# Altium PCB AccShelf2.PcbDoc
Units mm, origin at the board's own origin, x right, y up, seen from the top; angles counter-clockwise.
Board outline 195 x 72 mm, 2 copper layers (Top Layer, Bottom Layer); 32 components, 49 nets, 164 pads, 94 vias.
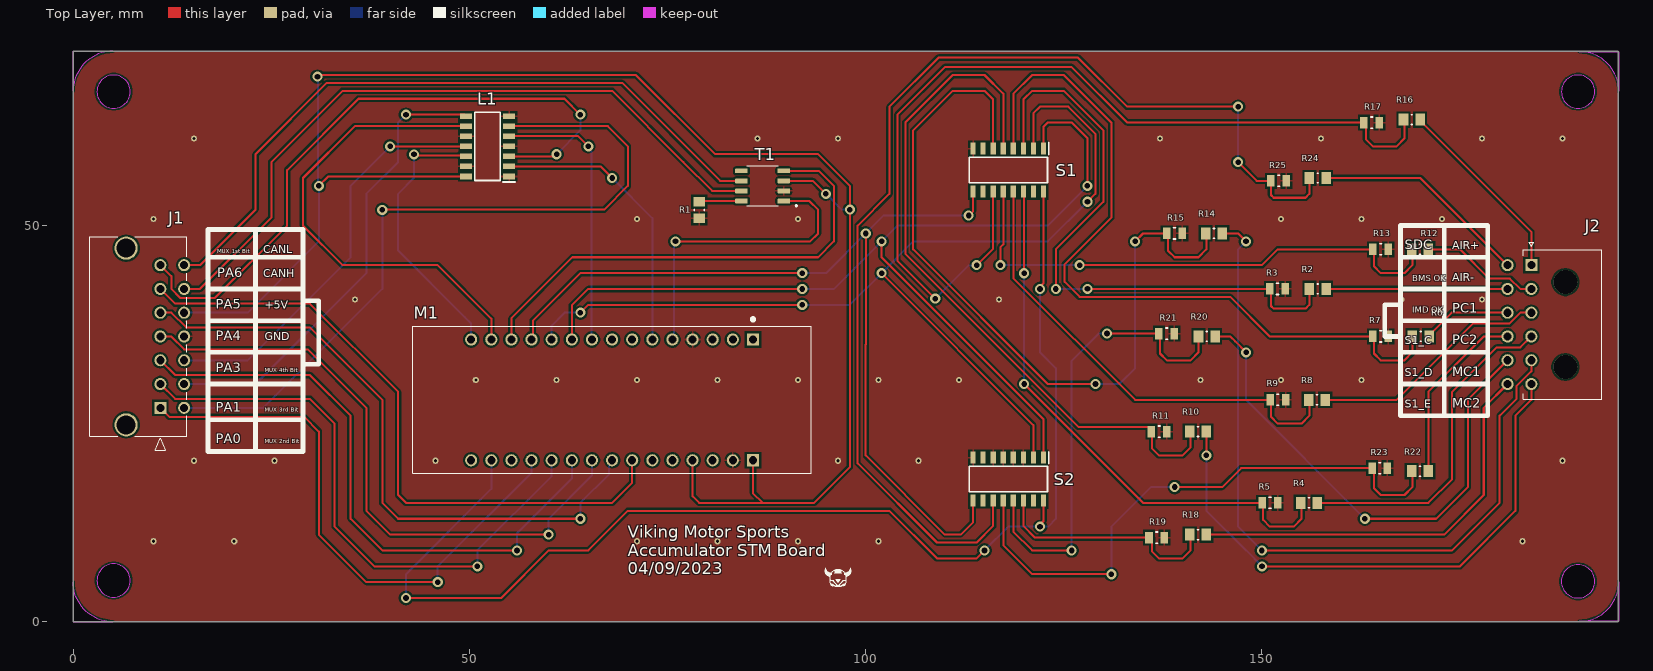
[diagram p0: Top Layer view]
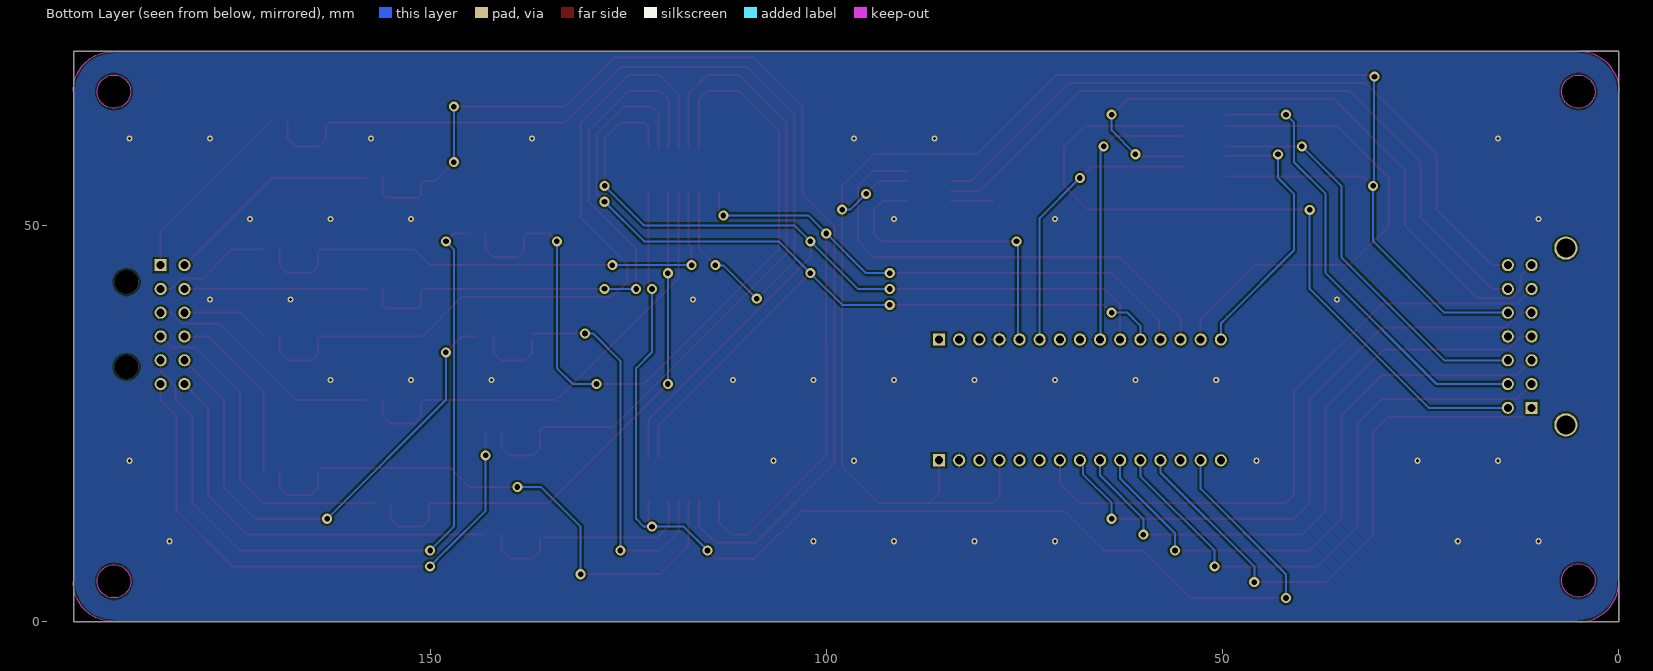
[diagram p1: Bottom Layer view, seen from below]
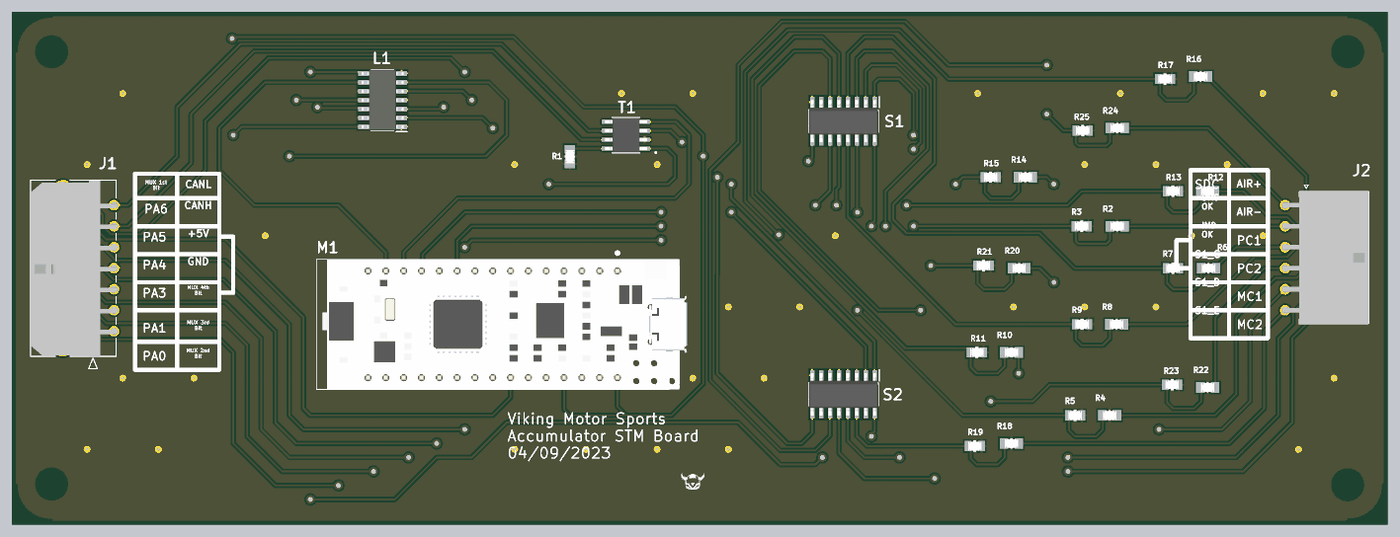
[diagram p2: 3D render of the assembled board from above, using the file's embedded part models]

## Layer stack, top to bottom
Top Solder: solder mask 0.0102, Solder Resist, Dk 3.5
Top Layer: signal copper 0.0356
Dielectric 1: dielectric 0.32, FR-4, Dk 4.8
Bottom Layer: signal copper 0.0356
Bottom Solder: solder mask 0.0102, Solder Resist, Dk 3.5

## Board outline
0,0 0,72 195,72 195,0
cut-out: 0,72 5,72 ccw(c5,67) 0,67
cut-out: 195.041,66.965 ccw(c190.045,66.965) 190.045,71.961 195.041,71.961
cut-out: 190.045,0.039 ccw(c190.045,5.035) 195.041,5.035 195.041,0.039
cut-out: 0,0 5,0 cw(c5,5) 0,5
cut-out: 3,66.897 ccw(c5.1,66.897) 5.1,64.797 ccw(c5.1,66.897) 7.2,66.897 ccw(c5.1,66.897) 5.1,68.997 ccw(c5.1,66.897)
cut-out: 3,5.207 ccw(c5.1,5.207) 5.1,3.107 ccw(c5.1,5.207) 7.2,5.207 ccw(c5.1,5.207) 5.1,7.307 ccw(c5.1,5.207)
cut-out: 187.797,5.1 ccw(c189.897,5.1) 189.897,3 ccw(c189.897,5.1) 191.997,5.1 ccw(c189.897,5.1) 189.897,7.2 ccw(c189.897,5.1)
cut-out: 187.8,66.897 ccw(c189.9,66.897) 189.9,64.797 ccw(c189.9,66.897) 192,66.897 ccw(c189.9,66.897) 189.9,68.997 ccw(c189.9,66.897)

## Design rules (kind name [scope] priority, off if disabled: settings)
Clearance [All] p1: gap=0.254 ignorepadtopadclearanceinfootprint=FALSE except(0: Arc-Hole Track-Hole SMDPad-Hole THPad-Hole Via-Hole Fill-Hole Poly-Hole Region-Hole Text-Hole)
PolygonConnect [All] p1: connectstyle=Relief reliefconductorwidth=0.254 reliefentries=4 polygonreliefangle="90 Angle" airgapwidth=0.254
RoutingVias [All] p1: holewidth=0.711 width=1.27 viastyle="Through Hole" minholewidth=0.711 minwidth=1.27 maxholewidth=0.711 maxwidth=1.27
SolderMaskExpansion [All] p1: expansion=0.102 istentingtop=FALSE
Width [All] p1: maxlimit=0.254 minlimit=0.254 preferedwidth=0.254
30 further rules are at their usual default settings.

## Components (designator, comment, footprint, x,y, rotation, side; value= is the part's Value field where it differs from the comment)
J1 "14 Pin Dual-Inline Connector" "14 Pin Dual In-Line Connector" 11,27 r270 top
J2 "12 Pin Dual-Inline Connector" "12 Pin Dual Inline Connector" 184,45 r90 top
L1 "74AHCT125S14-13" "Level Shifter" 52.289,60 r180 top
M1 "STM32" "STM Footprint" 68,28 r270 top
R1 "CRCW080510K0FKEA" FP-CRCW0805-e3-IPC_A 79,51.949 r90 top value=10kR
R2 "CRCW0805270KFKEA" FP-CRCW0805-e3-IPC_A 157.051,42 r180 top
R3 "CRCW0805100KFKEA" FP-CRCW0805-e3-MFG 151.975,42 r0 top
R4 "CRCW0805270KFKEA" FP-CRCW0805-e3-IPC_A 155.949,15 r180 top
R5 "CRCW0805100KFKEA" FP-CRCW0805-e3-MFG 151.025,15 r0 top
R6 "CRCW0805270KFKEA" FP-CRCW0805-e3-IPC_A 170.051,36 r180 top
R7 "CRCW0805100KFKEA" FP-CRCW0805-e3-MFG 164.975,36 r0 top
R8 "CRCW0805270KFKEA" FP-CRCW0805-e3-IPC_A 156.949,28 r180 top
R9 "CRCW0805100KFKEA" FP-CRCW0805-e3-MFG 152.025,28 r0 top
R10 "CRCW0805270KFKEA" FP-CRCW0805-e3-IPC_A 141.949,24 r180 top
R11 "CRCW0805100KFKEA" FP-CRCW0805-e3-MFG 137.025,24 r0 top
R12 "CRCW0805270KFKEA" FP-CRCW0805-e3-IPC_A 169.949,47 r180 top
R13 "CRCW0805100KFKEA" FP-CRCW0805-e3-MFG 164.975,47 r0 top
R14 "CRCW0805270KFKEA" FP-CRCW0805-e3-IPC_A 143.949,49 r180 top
R15 "CRCW0805100KFKEA" FP-CRCW0805-e3-MFG 138.975,49 r0 top
R16 "CRCW0805270KFKEA" FP-CRCW0805-e3-IPC_A 168.927,63.375 r180 top
R17 "CRCW0805100KFKEA" FP-CRCW0805-e3-MFG 163.855,63 r0 top
R18 "CRCW0805270KFKEA" FP-CRCW0805-e3-IPC_A 141.949,11 r180 top
R19 "CRCW0805100KFKEA" FP-CRCW0805-e3-MFG 136.731,10.625 r0 top
R20 "CRCW0805270KFKEA" FP-CRCW0805-e3-IPC_A 143.051,36 r180 top
R21 "CRCW0805100KFKEA" FP-CRCW0805-e3-MFG 137.978,36.375 r0 top
R22 "CRCW0805270KFKEA" FP-CRCW0805-e3-IPC_A 169.949,19 r180 top
R23 "CRCW0805100KFKEA" FP-CRCW0805-e3-MFG 164.877,19.375 r0 top
R24 "CRCW0805270KFKEA" FP-CRCW0805-e3-IPC_A 157.051,56 r180 top
R25 "CRCW0805100KFKEA" FP-CRCW0805-e3-MFG 152.123,55.65 r0 top
S1 "SN74HC165QDRQ1" "Shift Register" 118,57 r270 top
S2 "SN74HC165QDRQ1" "Shift Register" 118,18 r270 top
T1 "CAN Transceiver" "CAN Transceiver" 87,55 r180 top

## Footprints (in the part's own frame and the unit in brackets; to place one, negate y for a bottom-side part, rotate by r counter-clockwise, add the part's x,y. Pads: shape width x height; smd on the part's side, far side on the other; paste and mask are expansions set on the pad)
"12 Pin Dual Inline Connector" [mm]
  rect 1.52x1.52 / inner round 1.52 / far side rect 1.52x1.52 hole 1.02 mask+0.076: 1(0,0)
  round 1.52 hole 1.02 mask+0.076: 2(-3,0) 3(-6,0) 4(-9,0) 5(-12,0) 6(-15,0) 7(0,3) 8(-3,3) 9(-6,3) 10(-9,3) 11(-12,3) 12(-15,3)
  round 3 hole 3 unplated mask+0.076: ""(-12.84,-4.3) ""(-2.14,-4.3)
  silkscreen extent -16.93,-8.9 2.9,1.01, body extent -16.92,-8.89 1.93,3.29, height 8.81
"14 Pin Dual In-Line Connector" [mm]
  rect 1.52x1.52 / inner round 1.524 / far side rect 1.52x1.52 hole 1.02 paste-0.76 mask+0.076: 1(0,0)
  round 1.52 / inner round 1.524 / far side round 1.52 hole 1.02 paste-0.76 mask+0.076: 2(-3,0) 3(-6,0) 4(-9,0) 5(-12,0) 6(-15,0) 7(-18,0) 8(0,3) 9(-3,3) 10(-6,3) 11(-9,3) 12(-12,3) 13(-15,3) 14(-18,3)
  round 2.91 / inner round 1.524 / far side round 2.91 hole 2.41 paste-1.455 mask+0.076: P1(2.15,-4.32) P2(-20.15,-4.32)
  silkscreen extent -21.57,-8.92 5.35,3.32, body extent -21.51,-8.89 3.68,3.35, height 8.78
"CAN Transceiver" [mm]
  rrect25% 1.58x0.6 smd: 1(-2.67,1.905) 2(-2.67,0.635) 3(-2.67,-0.635) 4(-2.67,-1.905) 5(2.67,-1.905) 6(2.67,-0.635) 7(2.67,0.635) 8(2.67,1.905)
  silkscreen extent -4.35,-2.52 1.99,2.6, body extent -3,-2.45 3,2.45, height 1.76
FP-CRCW0805-e3-IPC_A [mil]
  rect 47.5x59.38 smd paste+0 mask+0: 1(-41.37,0) 2(41.37,0)
  silkscreen extent -3,-25 3,25, body extent -85,-49 85,49, height 10
FP-CRCW0805-e3-MFG [mm]
  rect 0.95x1.45 smd paste+0 mask+0: 1(-0.975,0) 2(0.975,0)
  silkscreen extent -0.13,-0.7 0.13,0.7, body extent -1.55,-0.82 1.55,0.82, height 0.25
"Level Shifter" [mm]
  rect 1.528x0.7 smd: 1(-2.711,3.81) 2(-2.711,2.54) 3(-2.711,1.27) 4(-2.711,0) 5(-2.711,-1.27) 6(-2.711,-2.54) 7(-2.711,-3.81) 8(2.711,-3.81) 9(2.711,-2.54) 10(2.711,-1.27) 11(2.711,0) 12(2.711,1.27) 13(2.711,2.54) 14(2.711,3.81)
  silkscreen extent -3.47,-4.32 1.6,4.51, body extent -10,-3.38 10,3.38, height 5.8
"Shift Register" [mm]
  rect 1.525x0.65 smd: 1(-2.712,4.445) 2(-2.712,3.175) 3(-2.712,1.905) 4(-2.712,0.635) 5(-2.712,-0.635) 6(-2.712,-1.905) 7(-2.712,-3.175) 8(-2.712,-4.445) 9(2.712,-4.445) 10(2.712,-3.175) 11(2.712,-1.905) 12(2.712,-0.635) 13(2.712,0.635) 14(2.712,1.905) 15(2.712,3.175) 16(2.712,4.445)
  silkscreen extent -3.47,-4.95 1.6,5.12, body extent -10,-3.38 10,3.38, height 5.8
"STM Footprint" [mm]
  rect 1.53x1.53 hole 1.02: 1(-7.62,17.78) 16(7.62,17.78)
  round 1.53 hole 1.02: 2(-7.62,15.24) 3(-7.62,12.7) 4(-7.62,10.16) 5(-7.62,7.62) 6(-7.62,5.08) 7(-7.62,2.54) 8(-7.62,0) 9(-7.62,-2.54) 10(-7.62,-5.08) 11(-7.62,-7.62) 12(-7.62,-10.16) 13(-7.62,-12.7) 14(-7.62,-15.24) 15(-7.62,-17.78) 17(7.62,15.24) 18(7.62,12.7) 19(7.62,10.16) 20(7.62,7.62) 21(7.62,5.08) 22(7.62,2.54) 23(7.62,0) 24(7.62,-2.54) 25(7.62,-5.08) 26(7.62,-7.62) 27(7.62,-10.16) 28(7.62,-12.7) 29(7.62,-15.24) 30(7.62,-17.78)
  silkscreen extent -10.36,-25.14 9.27,25.14, body extent -9.27,-24.29 9.27,27.71, height 8.51

## Part data
J1: "Rectangular Power Connector, 14 Contact(s), Male, Solder Terminal", Flammability Rating="UL94 V-0", Manufacturer=Molex, Manufacturer Part Number=212528-1200, Package=None, Supplier Part Number=538-212528-1200, Availability=Unavailable, Category="Headers and Wire Housings", ComponentLink1Description=http://datasheet.octopart.com/2125281200-Molex-datasheet-147959482.pdf?src-supplier=Rs, ComponentLink1URL=http://datasheet.octopart.com/2125281200-Molex-datasheet-147959482.pdf?src-supplier=Rs, ComponentLink2Description=https://datasheet.ciiva.com:443/pdfs/VipMasterIC/IC/MOLE/MOLE-S-A0003112043/MOLE-S-A0003112043-1.pdf?src-supplier=IHS+Markit, ComponentLink2URL=https://datasheet.ciiva.com:443/pdfs/VipMasterIC/IC/MOLE/MOLE-S-A0003112043/MOLE-S-A0003112043-1.pdf?src-supplier=IHS+Markit, ComponentLink3Description=https://datasheet.ciiva.com/6841/430450223-sd-6841489.pdf?src-supplier=Digi-Key, ComponentLink3URL=https://datasheet.ciiva.com/6841/430450223-sd-6841489.pdf?src-supplier=Digi-Key, Connector Type=Power,Rectangular, Contact Gender=Male, DIN Conformance=No, Empty Shell=No, Filter Feature=No, IEC Conformance=No, Mating Information="MULTIPLE MATING PARTS AVAILABLE", MF="{'manufacturer': u'Molex'}", MIL Conformance=No, Mixed Contacts=No, Mounting Technology=Board, MP=2125281200, Number of Contacts=14, Option="General Purpose", Price=None, Pricing="1=3.35000, 10=2.96000, 50=2.96000, 100=2.96000, 1000=2.28000, 10000=1.94000 (USD)", Reach SVHC Compliant=Yes, RoHS=No, RoHS Compliant=Yes, Shell Material=Polyethylene, Stock=1070, Supplier=Mouser, Termination=Solder
J2: "Conn Micro-Fit Power HDR 12 POS 3mm Solder RA Through Hole 12 Terminal Single Port Tray", Manufacturer=Molex, Manufacturer Part Number=212528-1200, Package=None, Supplier Part Number=538-212528-1200, Availability=Unavailable, Category="Headers and Wire Housings", ComponentLink1Description=http://datasheet.octopart.com/2125281200-Molex-datasheet-147959482.pdf?src-supplier=Rs, ComponentLink1URL=http://datasheet.octopart.com/2125281200-Molex-datasheet-147959482.pdf?src-supplier=Rs, MF="{'manufacturer': u'Molex'}", MP=2125281200, Price=None, Pricing="1=3.35000, 10=2.96000, 50=2.96000, 100=2.96000, 1000=2.28000, 10000=1.94000 (USD)", RoHS=No, Stock=1070, Supplier=Mouser
L1: library part "Level Shifter", "Bus Driver, AHCT/VHCT/VT Series, 4-Func, 1-Bit, True Output, CMOS, PDSO14", Case/Package=SOP, Load Capacitance (CL)=50pF, Manufacturer=Diodes, Manufacturer_Name="Diodes Inc.", Max Operating Temperature=125°C, Max Supply Voltage=5.5V, Min Operating Temperature=-40°C, Min Supply Voltage=4.5V, Mouser Part Number=621-74AHCT125S14-13, Nominal Supply Voltage=5V, Package Body Material=Plastic, Package Equivalence Code=SOP14,.25, Package Shape=Rectangular, Package Style="SMALL OUTLINEMeter", Peak Reflow Temperature (Cel)=260°C, Power Supply Current-Max (ICC)=40uA, Temperature Grade=AUTOMOTIVE, Time @ Peak Reflow Temperature-Max (s)=40s, Arrow Part Number=74AHCT125S14-13, Arrow Price/Stock=https://www.arrow.com/en/products/74ahct125s14-13/diodes-incorporated?region=nac, Category="Buffers, Drivers and Transceivers", Channels=4, ComponentLink1Description=https://datasheet.ciiva.com:443/pdfs/VipMasterIC/IC/DIOD/DIODS15860/DIODS15860-1.pdf?src-supplier=IHS+Markit, ComponentLink1URL=https://datasheet.ciiva.com:443/pdfs/VipMasterIC/IC/DIOD/DIODS15860/DIODS15860-1.pdf?src-supplier=IHS+Markit, ComponentLink2Description=https://datasheet.ciiva.com/25651/74ahct125-25651120.pdf?src-supplier=Digi-Key, ComponentLink2URL=https://datasheet.ciiva.com/25651/74ahct125-25651120.pdf?src-supplier=Digi-Key, ComponentLink3Description=https://datasheet.ciiva.com/29883/74ahct125-29883446.pdf?src-supplier=Avnet, ComponentLink3URL=https://datasheet.ciiva.com/29883/74ahct125-29883446.pdf?src-supplier=Avnet, Control Type="ENABLE LOW", Datasheet Link=http://uk.rs-online.com/web/p/products/7988941, Geometry.Height=1.73mm, Height - Seated (Max)=1.73mm, JESD-30 Code=R-PDSO-G14, JESD-609 Code=e3, Length=8.635mm, Logic Type="BUS DRIVER", Manufacturer Part Number=74AHCT125S14-13, Manufacturer_Part_Number=74AHCT125S14-13, Max I(ol)=8mA, Moisture Sensitivity Level=1, Mouser Price/Stock=https://www.mouser.co.uk/ProductDetail/Diodes-Incorporated/74AHCT125S14-13?qs=pYVYkI7xuRUA0d%2Fp2SGl5A%3D%3D, Number of Bits=1, Number of Ports=2, Output Characteristics=3-STATE, Output Polarity=True, Packaging="Tape and Reel", Pins=14, Power Supplies=5V, Pricing="2500=0.06080, 5000=0.05862, 10000=0.05686, 15000=0.05520, 20000=0.05312, 25000=0.05229, 250000=0.05146 (USD)", Prop. Delay@Nom-Sup=9.5ns, Propagation Delay (tpd)=9.5ns, Qualification Status="Not Qualified", Reach SVHC Compliant=Yes, RoHS=Yes, RoHS Compliant=Yes, Stock=22500, Supplier=Avnet, Supplier Part Number=74AHCT125S14-13, Surface Mount=Yes, Technology=CMOS, Terminal Finish=Tin, Terminal Form="Gull Wing", Terminal Pitch=1.27mm, Terminal Position=DUAL, Width=3.895mm
M1: "STM32 Nucleo-32 development board with STM32F303K8 MCU, supports Arduino connectivity", Manufacturer=STMicroelectronics, Manufacturer Part Number=NUCLEO-F303K8, Supplier Part Number=68Y1244, Category="Embedded Processors and Controllers", ComponentLink1Description=http://www.farnell.com/datasheets/2064195.pdf?src-supplier=Farnell, ComponentLink1URL=http://www.farnell.com/datasheets/2064195.pdf?src-supplier=Farnell, ComponentLink2Description=http://www.st.com/content/ccc/resource/technical/document/data_brief/b1/d8/13/d4/b0/b7/4b/6e/DM00214578.pdf/files/DM00214578.pdf/jcr:content/translations/en.DM00214578.pdf?src-supplier=Digi-Key, ComponentLink2URL=http://www.st.com/content/ccc/resource/technical/document/data_brief/b1/d8/13/d4/b0/b7/4b/6e/DM00214578.pdf/files/DM00214578.pdf/jcr:content/translations/en.DM00214578.pdf?src-supplier=Digi-Key, ComponentLink3Description=http://www.st.com/st-web-ui/static/active/en/resource/technical/document/user_manual/DM00116575.pdf?s_searchtype=keyword&src-supplier=Avnet, ComponentLink3URL=http://www.st.com/st-web-ui/static/active/en/resource/technical/document/user_manual/DM00116575.pdf?s_searchtype=keyword&src-supplier=Avnet, ComponentLink4Description=http://www.farnell.com/datasheets/1966773.pdf?src-supplier=Element14, ComponentLink4URL=http://www.farnell.com/datasheets/1966773.pdf?src-supplier=Element14, ComponentLink5Description=http://www.farnell.com/datasheets/2064195.pdf?src-supplier=Newark, ComponentLink5URL=http://www.farnell.com/datasheets/2064195.pdf?src-supplier=Newark, Core Architecture=ARM, Evaluation Kit=Yes, Lead Free="Lead Free", Number of Bits=32, Pricing="1=10.33000 (USD)", Reach SVHC Compliant=Yes, RoHS=No, Series=STM32F3, Stock=226, Supplier=Newark
R1: library part CMP-2001-04908-2, "RES Thick Film, 10kΩ, 1%, 0.125W, 100ppm/°C, 0805", Case Code (Imperial)=0805, Case Code (Metric)=2012, Manufacturer=Vishay, Max Operating Temperature=155°C, Min Operating Temperature=-55°C, Package Height=0.45mm, Package Length=2mm, Package Quantity=5000, Package Shape=Rectangular, Package Style=SMTMeter, Package Width=1.25mm, Power=125mW, Rated Temperature=70°C, Resistance=10kR, Resistor Type="FIXED RESISTOR", Supplier Part Number=24W3284, Temperature Coefficient=100ppm/°C, Tolerance=1%, Voltage Rating=150V, Case/Package=0805, Category="Chip SMD Resistors", ComponentLink1Description=https://datasheet.ciiva.com:443/pdfs/VipMasterIC/IC/VISH/VISH-S-A0007266705/VISH-S-A0007266705-1.pdf?src-supplier=IHS+Markit, ComponentLink1URL=https://datasheet.ciiva.com:443/pdfs/VipMasterIC/IC/VISH/VISH-S-A0007266705/VISH-S-A0007266705-1.pdf?src-supplier=IHS+Markit, ComponentLink2Description=https://datasheet.ciiva.com/46394/1720486-46394381.pdf?src-supplier=Element14, ComponentLink2URL=https://datasheet.ciiva.com/46394/1720486-46394381.pdf?src-supplier=Element14, ComponentLink3Description=https://datasheet.ciiva.com/16719/70201119-16719082.pdf?src-supplier=Allied+Electronics, ComponentLink3URL=https://datasheet.ciiva.com/16719/70201119-16719082.pdf?src-supplier=Allied+Electronics, ComponentLink4Description=https://datasheet.ciiva.com/16755/70201119-16755389.pdf?src-supplier=Allied+Electronics, ComponentLink4URL=https://datasheet.ciiva.com/16755/70201119-16755389.pdf?src-supplier=Allied+Electronics, ComponentLink5Description=https://datasheet.ciiva.com/5547/dcrcwe3-109170-5547559.pdf?src-supplier=Mouser, ComponentLink5URL=https://datasheet.ciiva.com/5547/dcrcwe3-109170-5547559.pdf?src-supplier=Mouser, Composition="Thick Film", Construction=Chip, Contact Plating=Tin, Depth=1.25mm, Height=0.45mm, JESD-609 Code=e3, Lead Free="Lead Free", Length=2mm, Manufacturer Part Number=CRCW080510K0FKEA, Military Standard=Not, Mounting Technology="Surface Mount", Packaging="Tape and Reel", Pins=2, Power Rating=125mW, Pricing="1=0.00800, 5000=0.00800 (USD)", Radiation Hardening=No, Reach SVHC Compliant=Yes, Reference Standard=AEC-Q200, RoHS=Yes, RoHS Compliant=Yes, Stock=980000, Supplier=Newark, Technology="METAL GLAZE/THICK FILM", Terminal Finish=Nickel, Termination=SMD/SMT, Voltage Rating (DC)=150V, Weight=0.000194oz, Width=1.25mm, Working Voltage=150V
R2 R4 R6 R8 R10 R12 R14 R16 R18 R20 R22 R24: library part CMP-2001-03733-2, "RES Thick Film, 270kΩ, 1%, 0.125W, 100ppm/°C, 0805", Case Code (Imperial)=0805, Case Code (Metric)=2012, Max Operating Temperature=155°C, Min Operating Temperature=-55°C, Package Quantity=5000, Power Rating=125mW, Resistance=270kR, Temperature Coefficient=100ppm/°C, Tolerance=1%, Voltage Rating=150V, Case/Package=0805, Composition="Thick Film", Contact Plating=Tin, Depth=1.25mm, Height=0.45mm, Lead Free="Lead Free", Length=2mm, Military Standard=Not, Number of Pins=2, Packaging="Tape and Reel", Radiation Hardening=No, Termination=SMD/SMT, Voltage Rating (DC)=150V, Weight=0.000194oz, Width=1.25mm
R3 R5 R7 R9 R11 R13 R15 R17 R19 R21 R23 R25: library part CMP-2001-04899-2, "RES Thick Film, 100kΩ, 1%, 0.125W, 100ppm/°C, 0805", Case Code (Imperial)=0805, Case Code (Metric)=2012, Max Operating Temperature=155°C, Min Operating Temperature=-55°C, Package Quantity=5000, Power Rating=125mW, Resistance=100kR, Temperature Coefficient=100ppm/°C, Tolerance=1%, Voltage Rating=150V, Case/Package=0805, Composition="Thick Film", Contact Plating=Tin, Depth=1.25mm, Height=0.45mm, Lead Free="Lead Free", Length=2mm, Military Standard=Not, Mount="Surface Mount", Number of Pins=2, Packaging="Tape and Reel", Radiation Hardening=No, Termination=SMD/SMT, Voltage Rating (DC)=150V, Weight=0.000194oz, Width=1.25mm
S1 S2: library part "Shift Register", "Parallel In Serial Out, HC Series, 8-Bit, Right Direction, Complementary Output, CMOS, PDSO16", Case/Package=SOP, Manufacturer="Texas Instruments", Max Frequency@Nom-Sup=25MHz, Max Operating Temperature=125°C, Max Supply Voltage=6V, Min Operating Temperature=-40°C, Min Supply Voltage=2V, Mouser Part Number=595-SN74HC165QDRQ1, Nominal Supply Voltage=5V, Package Body Material=Plastic, Package Equivalence Code=SOP16,.25, Package Shape=Rectangular, Package Style="SMALL OUTLINEMeter", Peak Reflow Temperature (Cel)=260°C, Power Supplies=2/6V, Supplier Part Number=296-35928-1-ND, Temperature Grade=AUTOMOTIVE, Arrow Part Number=SN74HC165QDRQ1, Arrow Price/Stock=https://www.arrow.com/en/products/sn74hc165qdrq1/texas-instruments, Category="Shift Registers", Channels=1, Clock Edge Trigger Type="Positive Edge", ComponentLink1Description=https://www.ti.com:443/lit/ds/symlink/sn74hc165-q1.pdf?src-supplier=IHS+Markit, ComponentLink1URL=https://www.ti.com:443/lit/ds/symlink/sn74hc165-q1.pdf?src-supplier=IHS+Markit, ComponentLink2Description=https://datasheet.ciiva.com/18575/sn74hc165-q1-18575046.pdf?src-supplier=Digi-Key, ComponentLink2URL=https://datasheet.ciiva.com/18575/sn74hc165-q1-18575046.pdf?src-supplier=Digi-Key, ComponentLink3Description=https://datasheet.ciiva.com/18575/sn74hc165-q1-18575047.pdf?src-supplier=Digi-Key, ComponentLink3URL=https://datasheet.ciiva.com/18575/sn74hc165-q1-18575047.pdf?src-supplier=Digi-Key, ComponentLink4Description=https://datasheet.ciiva.com/18575/sn74hc165-q1-18575048.pdf?src-supplier=Digi-Key, ComponentLink4URL=https://datasheet.ciiva.com/18575/sn74hc165-q1-18575048.pdf?src-supplier=Digi-Key, ComponentLink5Description=https://datasheet.ciiva.com/48704/001074775-da-01-en-ic-shift-regi-sn74hc165qdrq1-soic-16-tid-48704119.pdf?src-supplier=Conrad, ComponentLink5URL=https://datasheet.ciiva.com/48704/001074775-da-01-en-ic-shift-regi-sn74hc165qdrq1-soic-16-tid-48704119.pdf?src-supplier=Conrad, Count Direction=RIGHT, Datasheet Link=http://www.ti.com/lit/gpn/sn74hc165-q1, fmax-Min=25MHz, Geometry.Height=1.75mm, Height - Seated (Max)=1.75mm, JESD-30 Code=R-PDSO-G16, JESD-609 Code=e4, Length=9.9mm, Logic Type="PARALLEL IN SERIAL OUT", Manufacturer Part Number=SN74HC165QDRQ1, Manufacturer_Name="Texas Instruments", Manufacturer_Part_Number=SN74HC165QDRQ1, Moisture Sensitivity Level=1, Mouser Price/Stock=https://www.mouser.co.uk/ProductDetail/Texas-Instruments/SN74HC165QDRQ1?qs=AgY10sKTvDLN6%2Fwfup846w%3D%3D, Number of Bits=8, Output Polarity=Complementary, Pins=16, Pricing="1=0.62000, 10=0.54200, 25=0.50920, 100=0.41570, 250=0.38612, 500=0.32860, 1000=0.26288 (USD)", Propagation Delay (tpd)=225ns, Qualification Status="Not Qualified", Reach SVHC Compliant=Yes, RoHS=Yes, RoHS Compliant=Yes, Supplier=Digi-Key, Surface Mount=Yes, Technology=CMOS, Terminal Finish=Nickel, Terminal Form="Gull Wing", Terminal Pitch=1.27mm, Terminal Position=DUAL, Width=3.9mm
T1: "1/1 Transceiver Half CAN 8-SOIC", Case/Package=SOIC, Manufacturer=Microchip, Manufacturer Part Number=MCP2551-I/SN, Max Operating Temperature=85°C, Max Supply Current=75mA, Max Supply Voltage=5.5V, Min Operating Temperature=-40°C, Min Supply Voltage=4.5V, Operating Supply Voltage=5V, Package=None, Package Body Material=Plastic, Package Quantity=100, Package Shape=Rectangular, Peak Reflow Temperature (Cel)=260°C, Supplier Part Number=69K7604, Temperature Grade=INDUSTRIAL, Time @ Peak Reflow Temperature-Max (s)=40s, Availability=Unavailable, Category="Interface ICs", Channels=1, ComponentLink1Description=https://datasheet.ciiva.com/27056/2040583-27056423.pdf?src-supplier=Jameco, ComponentLink1URL=https://datasheet.ciiva.com/27056/2040583-27056423.pdf?src-supplier=Jameco, ComponentLink2Description=https://datasheet.ciiva.com/8084/jp011797-8084592.pdf?src-supplier=Avnet, ComponentLink2URL=https://datasheet.ciiva.com/8084/jp011797-8084592.pdf?src-supplier=Avnet, ComponentLink3Description=https://datasheet.ciiva.com/14152/eb644223-644224-e-14152540.pdf?src-supplier=Distrelec, ComponentLink3URL=https://datasheet.ciiva.com/14152/eb644223-644224-e-14152540.pdf?src-supplier=Distrelec, ComponentLink4Description=https://datasheet.ciiva.com/1495/21667f-1495089.pdf?src-supplier=Element14, ComponentLink4URL=https://datasheet.ciiva.com/1495/21667f-1495089.pdf?src-supplier=Element14, ComponentLink5Description=https://datasheet.ciiva.com/1700/21667f-1700023.pdf?src-supplier=Digi-Key, ComponentLink5URL=https://datasheet.ciiva.com/1700/21667f-1700023.pdf?src-supplier=Digi-Key, Contact Plating=Tin,Matte, Data Rate=1Mbps, Height=1.25mm, Interface=Serial,CAN, JESD-30 Code=R-PDSO-G8, Lead Free="Lead Free", Length=4.9mm, Logic Function=Transceiver, Moisture Sensitivity Level=1, Mounting Technology="Surface Mount", MP=MCP2551-I/SN, Nominal Supply Current=75mA, Nominal Supply Voltage=5.5V, Number of Drivers=1, Number of Receive Buffers=1, Number of Receivers=1, Number of Terminals/Pins=8, Number of Transceivers=1, Number of Transmit Buffers=1, Packaging=Rail/Tube, Pins=8, Price=None, Pricing="1=1.37000, 10=1.32000, 25=1.26000, 50=1.26000, 100=1.25000 (USD)", Radiation Hardening=No, Reach SVHC Compliant=Yes, RoHS=Yes, RoHS Compliant=Yes, Slew Rate=8.5V/µs, Stock=47560, Supplier=Newark, Supply Current=75mA, Surface Mount=Yes, Terminal Finish=Tin, Terminal Form="Gull Wing", Terminal Position=DUAL, Width=3.9mm

## Via types
v1: diameter 1.27, hole 0.711, Top Layer to Bottom Layer, tented both sides, 54 vias
v2: diameter 0.762, hole 0.381, Top Layer to Bottom Layer, 40 vias

## Nets (pads, with @x,y where several pads share a name; then routed paths per layer and width w, separated by ;. In a path a pad name is that pad's centre, name@x,y a point inside that pad or via, vN(x,y) a via of type N, cw(c..) or ccw(c..) an arc to the next point about the centre after c; other vN are vias at no path point)
"3.3 V": M1.29 S1.16 S2.16 | length 158.7
  Top Layer w0.254: v1(42,3) 54,3 60,9 65,9 70,14 103,14 109,8 114,8 v1(115,9) ; v1(122,12) 122,12.275 122.445,12.72 S2.16 ; v1(122,42) 122,42.275 122.445,42.72 S1.16
  Bottom Layer w0.254: v1(42,3) 42,6 52.76,16.76 M1.29 ; v1(115,9) 118,12 v1(122,12) 122.016,12.016 123.016,12.016 124,13 124,32 122,34 v1(122,42)
"+5 V": J1.12 L1.14 M1.16 M1.19 T1.3 | length 211.5
  Top Layer w0.254: v1(30.828,68.795) 31,68.967 31,69 71,69 81,59 94,59 98,55 v1(98,52) 98,19.508 93.492,15 87,15 ; v1(31,55) 32.19,56.19 L1.14 ; M1.19 78.16,15.84 79,15 87,15 ; M1.16 85.78,16.22 87,15 ; T1.3 93.349,55.635 v1(94.984,54)
  Bottom Layer w0.254: J1.12 22,39 31,48 v1(31,55) 30.914,55.086 30.914,68.709 v1(30.828,68.795) ; v1(94.984,54) 95,54 97,52 v1(98,52)
AIR+: J2.1 R16.1 | length 24.2
  Top Layer w0.254: R16.1 169.978,63.224 184,49.202 J2.1
AIR-: J2.2 R12.1 | length 15.5
  Top Layer w0.254: R12.1@171.308,47.308 R12.1 175,47 178.692,43.308 181.306,43.308 182.614,42 J2.2
BMS_OK: J2.8 R2.1 | length 22.9
  Top Layer w0.254: R2.1 J2.8
CANH: J1.13 T1.7 | length 90
  Top Layer w0.254: J1.13 16,42 25,51 25,58 34,67 68,67 77,58 80.635,54.365 T1.7
CANL: J1.14 T1.6 | length 89.1
  Top Layer w0.254: J1.14 16,45 23,52 23,59 32,68 69.27,68 81.635,55.635 T1.6
GND: J1.11 L1.1 L1.4 L1.7 L1.10 L1.13 M1.4 M1.17 R1.1 R3.2 R5.2 R7.2 R9.2 R11.2 R13.2 R15.2 R17.2 R19.2 R21.2 R23.2 R25.2 S1.8 S2.3 S2.4 S2.5 S2.6 S2.8 T1.2
  other v2: 10.16,10.16 20.32,10.16 71.12,10.16 81.28,10.16 91.44,10.16 101.6,10.16 182.88,10.16 15.24,20.32 25.4,20.32 45.72,20.32 96.52,20.32 106.68,20.32 187.96,20.32 50.8,30.48 60.96,30.48 71.12,30.48 81.28,30.48 91.44,30.48 101.6,30.48 111.76,30.48 142.24,30.48 152.4,30.48 162.56,30.48 35.56,40.64 116.84,40.64 167.64,40.64 177.8,40.64 10.16,50.8 71.12,50.8 91.44,50.8 152.4,50.8 162.56,50.8 172.72,50.8 15.24,60.96 86.36,60.96 96.52,60.96 137.16,60.96 157.48,60.96 177.8,60.96 187.96,60.96
IMD_OK: J2.9 R6.1 | length 11.2
  Top Layer w0.254: R6.1 171.102,36.151 173.951,39 J2.9
MC1_MC: J2.5 R14.1 | length 96.2
  Top Layer w0.254: R14.1 147,49 v1(148,48) ; v1(150,9) 174,9 180,15 180,26 182.106,28.106 182.106,29.72 184,31.614 J2.5
  Bottom Layer w0.254: v1(148,48) 147,47 147,12 v1(150,9)
MC1_PC: J2.3 R8.1 | length 30.6
  Top Layer w0.254: R8.1 167,28 176.615,37.615 181.229,37.615 182.614,39 J2.3
MC2_MC: J2.6 R10.1 | length 71.6
  Top Layer w0.254: v1(143,21) R10.1 ; v1(150.013,7) 175,7 182,14 182,26 184,28 J2.6
  Bottom Layer w0.254: v1(143,21) 143,14 148,9 148.013,9 v1(150.013,7)
MC2_PC: J2.4 R4.1 | length 42.1
  Top Layer w0.254: R4.1 171,15 174,18 174,29 179.615,34.615 182.615,34.615 J2.4
"MUX 1st Bit": L1.2 M1.6 | length 36.1
  Top Layer w0.254: L1.2 66.54,57.46 v1(68,56)
  Bottom Layer w0.254: v1(68,56) 73.08,50.92 M1.6
"MUX 2nd Bit": L1.5 M1.9 | length 35.1
  Top Layer w0.254: L1.5 63.73,61.27 v1(65,60)
  Bottom Layer w0.254: v1(65,60) 65,59.725 65.413,59.312 65.413,35.667 M1.9
"MUX 3rd Bit": L1.9 M1.14 | length 60.5
  Top Layer w0.254: L1.9 35.54,62.54 29,56 29,50 34,45 46,45 52.76,38.24 M1.14
"MUX 4th Bit": L1.12 M1.15 | length 34.7
  Top Layer w0.254: v1(43,58.984) 43.119,58.865 49.443,58.865 L1.12
  Bottom Layer w0.254: v1(43,58.984) 43,56 41,54 41,46.851 49.414,38.438 50.202,37.649 50.202,35.638 M1.15
NetJ1_1: J1.1 M1.27 | length 72
  Top Layer w0.254: J1.1 12.141,25.859 29.141,25.859 31,24 31,11 37,5 v1(46,5)
  Bottom Layer w0.254: v1(46,5) 46,7 57.84,18.84 M1.27
NetJ1_2: J1.2 M1.26 | length 74.4
  Top Layer w0.254: J1.2 12.859,28.141 29.859,28.141 33,25 33,12 38,7 v1(51,7)
  Bottom Layer w0.254: v1(51,7) 51,9 60.38,18.38 M1.26
NetJ1_3: J1.3 M1.25 | length 76.8
  Top Layer w0.254: J1.3 12.859,31.141 29.859,31.141 35,26 35,13 39,9 v1(56,9)
  Bottom Layer w0.254: v1(56,9) 56,11.16 62.92,18.08 M1.25
NetJ1_4: J1.4 M1.24 | length 78.6
  Top Layer w0.254: J1.4 12.386,36 14.008,34.379 29.621,34.379 37,27 37,14 40,11 v1(60,11)
  Bottom Layer w0.254: v1(60,11) 60,13 65.46,18.46 M1.24
NetJ1_5: J1.5 M1.23 | length 80.4
  Top Layer w0.254: J1.5 12.386,39 14.245,37.141 29.859,37.141 39,28 39,15 41,13 v1(64,13)
  Bottom Layer w0.254: v1(64,13) 64,15 67.634,18.634 67.634,19.668 68,20.035 M1.23
NetJ1_6: J1.6 M1.22 | length 82.2
  Top Layer w0.254: J1.6 12.859,40.141 29.859,40.141 41,29 41,16 42,15 68,15 70.54,17.54 M1.22
NetJ1_7: J1.7 L1.3 | length 83.4
  Top Layer w0.254: J1.7 12.385,43.615 12.385,42.002 13.527,40.859 17.859,40.859 27,50 27,57 36,66 62,66 v1(64,64) ; L1.3 60.73,58.73 v1(61,59)
  Bottom Layer w0.254: v1(61,59) 64,62 v1(64,64)
NetJ1_8: J1.8 L1.6 | length 94.5
  Top Layer w0.254: v1(39,51.984) 39.016,52 67,52 70,55 70,60 67.46,62.54 L1.6
  Bottom Layer w0.254: J1.8 24,27 39,42 v1(39,51.984)
NetJ1_9: J1.9 L1.8 | length 58.5
  Top Layer w0.254: v1(42,64) 42.016,64.016 49.372,64.016 L1.8
  Bottom Layer w0.254: J1.9 23,30 37,44 37,54 41.016,58.016 41.016,63.016 v1(42,64)
NetJ1_10: J1.10 L1.11 | length 52
  Top Layer w0.254: v1(40,60) L1.11
  Bottom Layer w0.254: J1.10 22,33 35,46 35,55 v1(40,60)
NetM1_10: M1.10 S1.1 S2.1 | length 126.7
  Top Layer w0.254: M1.10 62.92,39.92 65,42 v1(92,42) ; v1(102.016,48) 102,47.984 102,46 122.445,25.555 S2.1 ; S1.1 122.445,62.445 123,63 126,63 128,61 v1@128,55
  Bottom Layer w0.254: v1(92,42) 96.016,42 v1(102.016,48) ; v1@102.008,48.008 104,50 123,50 127.984,54.984 v1(127.984,55)
NetM1_11: M1.11 S1.2 S2.2 | length 130.1
  Top Layer w0.254: v1(64,39) 65,40 v1(92,40) ; v1(102.016,44) 102.016,43.984 121.175,24.825 S2.2 ; S1.2 121.175,64.175 122,65 125.57,65 129,61.57 129,54 v1(128,53)
  Bottom Layer w0.254: M1.11 60.38,37.38 62,39 v1(64,39) ; v1(92,40) 98.008,40 102.008,44 v1(102.016,44) ; v1@102.008,44.008 106,48 123,48 v1(128,53)
NetM1_12: M1.12 S1.9 S2.9 | length 115.3
  Top Layer w0.254: M1.12 58,35.78 58,38 64,44 v1(92,44) ; v1(100.016,49) 100.016,43.984 100.016,37.003 100.016,35.016 100,35 100,21 110,11 112,11 113.555,12.555 S2.9 ; v1(113,51.275) 113.555,51.83 S1.9
  Bottom Layer w0.254: v1(92,44) 93,44 95,44 100.008,49.008 102.275,51.275 v1(113,51.275)
NetR1_2: R1.2 T1.8 | length 5.4
  Top Layer w0.254: R1.2 79.095,53.095 T1.8
NetR2_2: R2.2 R3.1 S1.3 | length 77.3
  Top Layer w0.254: S1.3 119.905,65.905 121,67 125,67 130,62 130,53 124,47 v1(124,42) ; v1(128,42.016) 150.984,42.016 R3.1 ; R3.1@151.148,41.65 151.148,39.852 151.492,39.508 155.508,39.508 156,40 R2.2
  Bottom Layer w0.254: v1(124,42) 124.016,42.016 v1(128,42.016)
NetR4_2: R4.2 R5.1 S1.14 | length 70
  Top Layer w0.254: S1.14 119.952,54.241 119.952,44.031 v1(120,43.984) ; v1(120,30) 135,15 R5.1 ; R5.1@150.148,14.65 150.148,12.852 151,12 154,12 155,13 R4.2@155,15
  Bottom Layer w0.254: v1(120,30) v1(120,43.984)
NetR6_2: R6.2 R7.1 S1.4 | length 96.5
  Top Layer w0.254: S1.4 118.635,66.635 121,69 125,69 131,63 131,51 125.105,45.105 125.105,42.895 127,41 146,41 151,36 R7.1 ; R7.1@164.148,35.65 164.148,33.852 165,33 168,33 169,34 R6.2
NetR8_2: R8.2 R9.1 S1.13 | length 59.1
  Top Layer w0.254: S1.13 118.635,43.365 134,28 R9.1 ; R9.1@151.148,27.65 151.148,25.852 152,25 155,25 156,26 R8.2@156,28
NetR10_2: R10.2 R11.1 S1.5 | length 89.2
  Top Layer w0.254: S1.5 117.365,66.635 115,69 111,69 105,63 105,46.437 126.839,24.598 135.702,24.598 136.05,24.25 R11.1 ; R11.1@136.148,23.65 136.148,21.852 137,21 140,21 141,22 R10.2@141,24
NetR12_2: R12.2 R13.1 S1.12 | length 66.7
  Top Layer w0.254: v1(117,45) 117,47.275 117.365,47.64 S1.12 ; v1(127,45) 150,45 152,47 R13.1 ; R13.1@164.148,46.65 164.148,44.852 165,44 168,44 169,45 R12.2@169,47
  Bottom Layer w0.254: v1(117,45) v1(127,45)
NetR14_2: R14.2 R15.1 S1.6 | length 99.5
  Top Layer w0.254: S1.6 116.095,65.905 115,67 111,67 106,62 106,47 123,30 v1(129,30) ; v1(134,48) 135,49 R15.1 ; R15.1@138.148,48.65 138.148,46.852 139,46 142,46 143,47 R14.2@143,49
  Bottom Layer w0.254: v1(129,30) 132,30 134,32 v1(134,48)
NetR16_2: R16.2 R17.1 S1.11 | length 116
  Top Layer w0.254: v1(108.782,40.782) 104,45.563 104,64 110,70 126,70 133,63 R17.1 ; v1(114,45) 116.095,47.095 S1.11 ; R17.1@163.148,62.65 163.148,60.852 164,60 167,60 168,61 R16.2@168,63
  Bottom Layer w0.254: v1(108.782,40.782) 112.984,44.984 113.984,44.984 v1(114,45)
NetR18_2: R18.2 R19.1 S2.14 | length 29.1
  Top Layer w0.254: S2.14 119.905,12.095 121.375,10.625 R19.1 ; R19.1@136.148,10.65 136.148,8.852 137,8 140,8 141,9 R18.2@141,11
NetR20_2: R20.2 R21.1 S2.13 | length 58
  Top Layer w0.254: S2.13 118.635,11.365 121,9 v1(126,9) ; v1(130.461,36.375) R21.1 ; R21.1@137.148,35.65 137.148,33.852 138,33 141,33 142,34 R20.2
  Bottom Layer w0.254: v1(126,9) 126,32.935 129.44,36.375 v1(130.461,36.375)
NetR22_2: R22.2 R23.1 S2.12 | length 72.2
  Top Layer w0.254: S2.12 117.365,9.635 121,6 v1(131,6) ; v1(139,17) 145,17 147.375,19.375 R23.1 ; 164.148,18.65 164.148,16.852 165,16 168,16 169,17 R22.2@169,19
  Bottom Layer w0.254: v1(131,6) 131,12 136,17 v1(139,17)
NetR24_2: R24.2 R25.1 S2.11 | length 142.2
  Top Layer w0.254: S2.11 116.095,12.095 114,10 109,10 99,20 99,50 103,54 103,65 109.208,71.208 126.792,71.208 133,65 v1(147,65) ; v1(147,58) 149.35,55.65 R25.1 151.148,53.852 151.492,53.508 155.508,53.508 156,54 R24.2
  Bottom Layer w0.254: v1(147,58) v1(147,65)
RX: M1.13 T1.4 | length 61.5
  Top Layer w0.254: M1.13 55.3,38.3 63,46 94,46 96,48 96,55 94.095,56.905 T1.4
S1_C: J2.10 R22.1 | length 22.9
  Top Layer w0.254: R22.1 171,29 178,36 J2.10
S1_D: J2.11 R20.1 | length 64.7
  Top Layer w0.254: R20.1 146,36 146.627,35.373 148,34 v1(148.016,34) ; v1(163,13) 172,13 176,17 176,28 J2.11
  Bottom Layer w0.254: v1(148.016,34) 148,33.984 148,28 v1(163,13)
S1_E: J2.12 R18.1 | length 52.3
  Top Layer w0.254: R18.1 173,11 178,16 178,27 J2.12
"SDC END": J2.7 R24.1 | length 27.5
  Top Layer w0.254: R24.1 170,56 J2.7
TX: M1.5 T1.1 | length 38.7
  Top Layer w0.254: v1(76,48) 93,48 94,49 94,52 92.905,53.095 T1.1
  Bottom Layer w0.254: M1.5 75.81,35.81 75.81,47.81 v1(76,48)
pads on no net: J1.P1 J1.P2 J2. M1.1 M1.2 M1.3 M1.7 M1.8 M1.18 M1.20 M1.21 M1.28 M1.30 S1.7 S1.10 S1.15 S2.7 S2.10 S2.15 T1.5

## Polygon pours and split planes (outlines as drawn)
GND on Bottom Layer "GND_L02_P001" (solid, pour order 1): 195.041,0.039 195.041,71.961 0.039,71.961 0,72 0,0 195.002,0 195.041,0.039 195.08,0 197,0
GND on Top Layer "GND_L01_P000" (solid, pour order 0): 195.041,0.039 195.041,71.961 0.039,71.961 0,72 0,0 195.002,0

## Silkscreen, mask and mechanical layers (free items; w line width, h text height)
Top Overlay:
  drawing of 34 lines, arcs and shapes, not listed
  text "SDC" at 168,47 h1.2
  text "AIR+" at 174,47 h1
  text "MUX 1st Bit" at 18.201,46.5 h0.5
  text "CANL" at 23.967,46.5 h1
  text "PA6" at 18.201,43.5 h1.2
  text "CANH" at 23.967,43.5 h1
  text "BMS OK" at 169,43 h0.8
  text "AIR-" at 174,43 h1
  text "PA5" at 18,39.5 h1.2
  text "+5V" at 24.201,39.5 h1
  text "IMD OK" at 169,39 h0.8
  text "PC1" at 174,39 h1.2
  text "PA4" at 18,35.5 h1.2
  text "GND" at 24.201,35.5 h1
  text "S1_C" at 168,35 h1
  text "PC2" at 174,35 h1.2
  text "PA3" at 18,31.5 h1.2
  text "MUX 4th Bit" at 24.201,31.5 h0.5
  text "S1_D" at 168,31 h1
  text "MC1" at 174,31 h1.2
  text "S1_E" at 168,27 h1
  text "MC2" at 174,27 h1.2
  text "PA1" at 18,26.5 h1.2
  text "MUX 3rd Bit" at 24.201,26.5 h0.5
  text "PA0" at 18,22.5 h1.2
  text "MUX 2nd Bit" at 24.201,22.5 h0.5
  text "Viking Motor Sports / Accumulator STM Board / 04/09/2023" at 70,6 h1.52
Board Outline:
  drawing of 197 lines, arcs and shapes, not listed